# Altium PCB Waistband.PcbDoc (part 1 of 2)
Units mil, origin at the board's own origin, x right, y up, seen from the top; angles counter-clockwise.
Board outline 3000 x 2000 mil, 2 copper layers (Top Layer, Bottom Layer); 52 components, 62 nets, 323 pads, 99 vias.
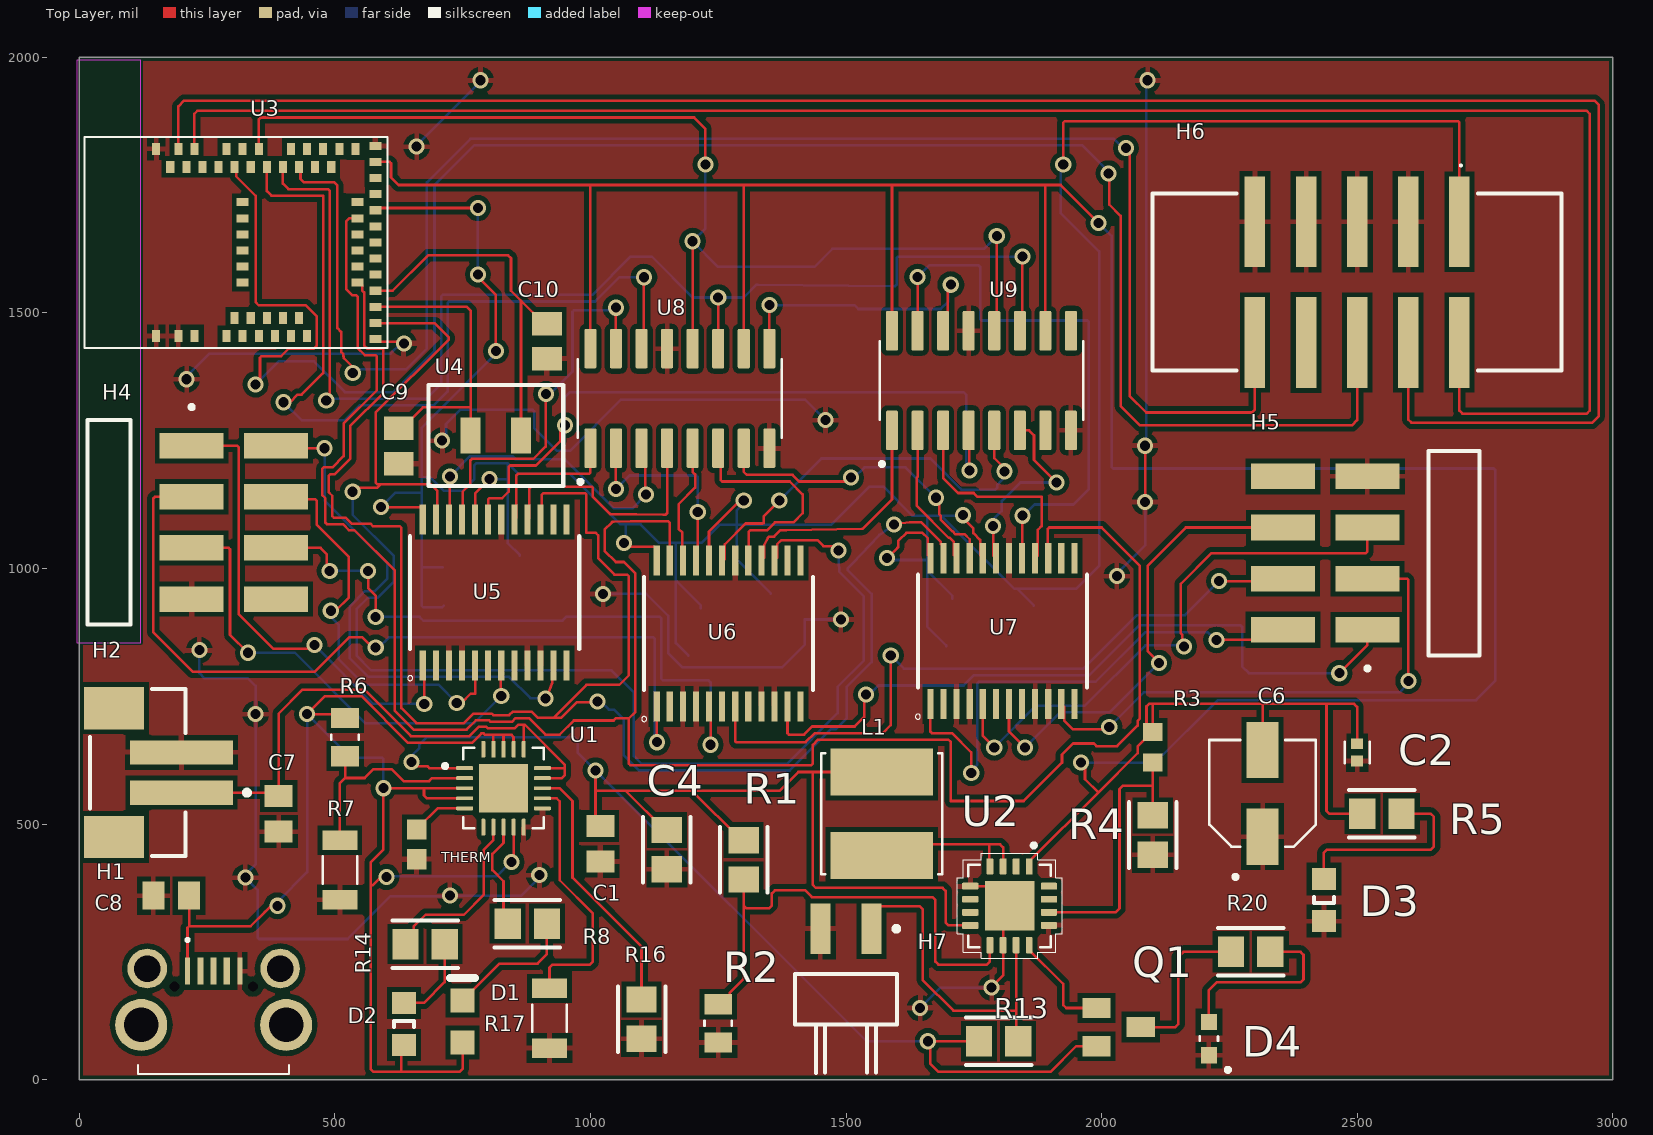
[diagram p0: Top Layer view]
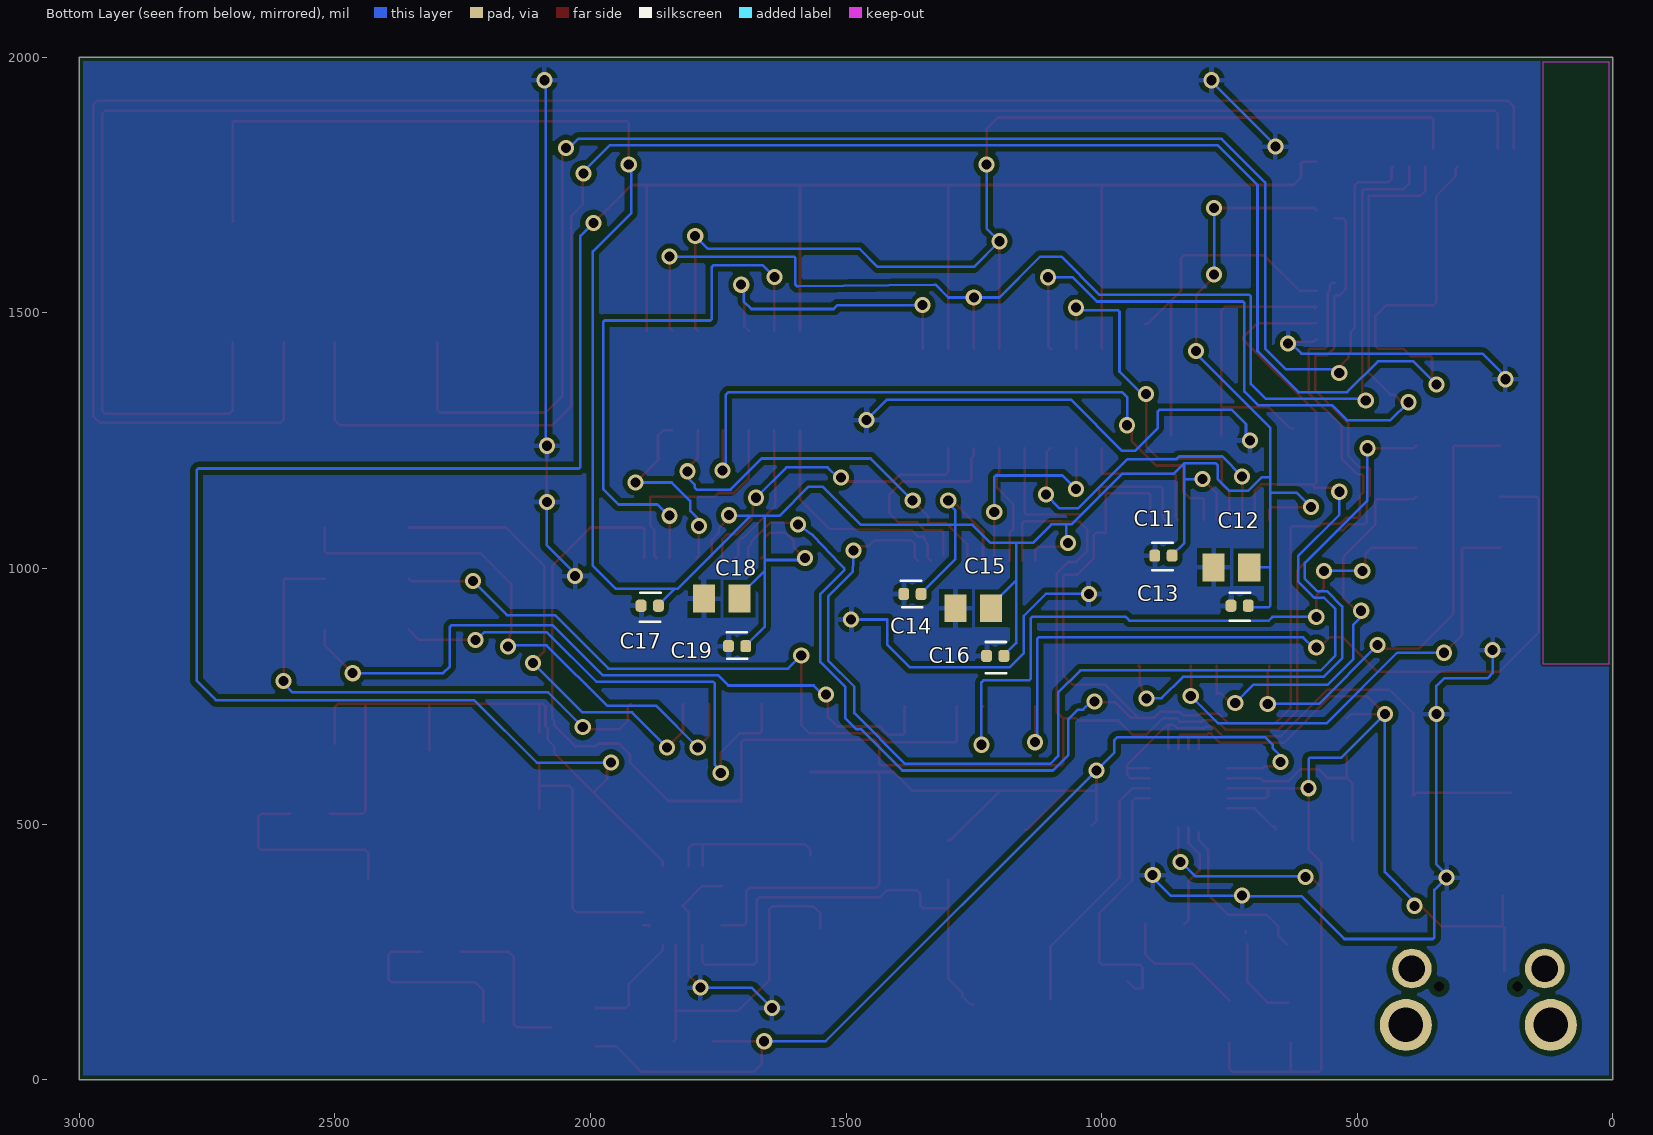
[diagram p1: Bottom Layer view, seen from below]

## Layer stack, top to bottom
Top Solder: solder mask 0.4, Solder Resist, Dk 3.5
Top Layer: signal copper 1.4
Dielectric 1: dielectric 12.6, FR-4, Dk 4.8
Bottom Layer: signal copper 1.4
Bottom Solder: solder mask 0.4, Solder Resist, Dk 3.5

## Board outline
0,0 0,2000 3000,2000 3000,0

## Design rules (kind name [scope] priority, off if disabled: settings)
AssemblyTestpoint [(IsPad And (OnTopLayer Or OnBottomLayer)) Or (IsVia)] p1: testpointundercomponent=TRUE minsize=10 maxsize=100 preferedsize=60 minholesize=0 maxholesize=100 preferedholesize=32 testpointgrid=1 usegrid=FALSE gridtolerance=0.01 allowsidetop=TRUE
BoardOutlineClearance [All] p1: gap=7.87 ignorepadtopadclearanceinfootprint=FALSE
Clearance [All] p1: gap=10 ignorepadtopadclearanceinfootprint=FALSE except(0: Arc-Hole Track-Hole SMDPad-Hole THPad-Hole Via-Hole Fill-Hole Poly-Hole Region-Hole Text-Hole; 5: SMDPad-SMDPad Fill-Fill Fill-Poly Fill-Region Poly-Poly Poly-Region Region-Region; 7.87: Arc-Arc Arc-Track Arc-SMDPad Track-Track Track-SMDPad; 12.99: Arc-THPad Track-THPad)
FabricationTestpoint [(IsPad And (OnTopLayer Or OnBottomLayer)) Or (IsVia)] p1: side=1 testpointundercomponent=TRUE minsize=10 maxsize=100 preferedsize=60 minholesize=0 maxholesize=40 preferedholesize=32 testpointgrid=1 allowsidetop=TRUE usegrid=FALSE gridtolerance=0.01
HoleSize [All] p1: absolutevalues=TRUE maxlimit=39.37 minlimit=7.87 maxpercent=80.000 minpercent=20.000
MinimumAnnularRing [All] p1: minimumring=5.12
MinimumSolderMaskSliver [All] p1: minsoldermaskwidth=8
PolygonConnect [All] p1: connectstyle=Relief reliefconductorwidth=10 reliefentries=4 polygonreliefangle="90 Angle" airgapwidth=10
RoutingVias [All] p1: holewidth=28 width=50 viastyle="Through Hole" minholewidth=7.87 minwidth=15.75 maxholewidth=28 maxwidth=50
SilkToSilkClearance [All] p1: silktosilkclearance=5.91
SilkToSolderMaskClearance [IsPad] p1: minsilkscreentomaskgap=5.91 clearancetoexposedcopper=TRUE
SolderMaskExpansion [All] p1: expansion=1.97 istentingtop=FALSE
Width [All] p1: maxlimit=10 minlimit=5 preferedwidth=5 minimp=50.000000 maximp=50.000000 favimp=50.000000
24 further rules are at their usual default settings.

## Classes and differential pairs
component class Waistband_shiftRegisters: U8 U9
component class Waistband_motorDrivers: C11 C12 C13 C14 C15 C16 C17 C18 C19 H4 H5 U5 U6 U7
component class Waistband_mcu: C9 C10 H6 U3 U4
component class PowerBooster: C1 C2 C4 C6 D3 D4 H7 L1 Q1 R1 R2 R3 R4 R5 R13 R20 U2
component class MCP: C7 C8 D1 D2 H1 H2 R6 R7 R8 R14 R16 R17 THERM U1

## Components (designator, comment, footprint, x,y, rotation, side; value= is the part's Value field where it differs from the comment)
C1 "10uF" C10uF 1019.68,461.57 r90 top
C2 "2.2uF" C2.2UF 2500,640 r90 top
C4 "C0805C104M5UACTU" "Res 0805 1k" 1159.68,270 r90 top
C6 "100uF" C100uF 2310,560 r90 top
C7 "10uF" C10uF 390,520 r90 top locked
C8 "10uF" C10uF 180,360 r0 top
C9 "22pF" 399-17627-1-ND 695,1199.45 r90 top
C10 "22pF" 399-17627-1-ND 985,1404.45 r90 top
C11 "0.1uf" C0.1uF 879,1025 r180 bottom
C12 "10uF" C10uF 746,1002 r180 bottom
C13 "0.1uF" C0.1uF 730,927 r180 bottom
C14 "0.1uF" C0.1uF 1370,950 r180 bottom
C15 "10uF" C10uF 1251,922 r180 bottom
C16 "0.1uF" C0.1uF 1208,829 r180 bottom
C17 "0.1uF" C0.1uF 1883.93,927 r180 bottom
C18 "10uF" C10uF 1743,941 r180 bottom
C19 "0.1uF" C0.1uF 1713,848 r180 bottom
D1 "Orange" LED_orange_0805 780,53.66 r90 top
D2 "Green" LED_green_0805 685,223.66 r270 top
D3 "Blue,Power" LED_blue_0805 2450,271.34 r90 top
D4 "RED" "LED RED" 2210,80 r90 top
H1 "KMMX-BSMT35S-B30TR" "MICROUSB Connector" 258,122 r0 top
H2 "0554600272" JST_Header 114.37,2575.63 r270 top locked
H4 "TSM-104-01-L-DH" SAM10277-ND 100.51,-3760 r90 top
H5 "TSM-104-01-L-DH" SAM10277-ND 2639.49,5880 r270 top
H6 "AWHW_10G-SMD" AWHW10GSMD 2500,1560 r180 top
H7 "BG301-02-A-0540-L-B" BG301-02-A-0540-L-B 2545,60 r180 top locked
L1 "6.8 uH" L6.8uH 1575,520 r90 top
Q1 "MMUN2133LT1G" "PNP BJT" 2033.31,102.6 r270 top locked
R1 "1.87M" "Res 0805 1k" 1309.68,250 r90 top
R2 "340k" R340K 1250,110 r90 top
R3 "1.07M" R1.07M 2100,650 r90 top
R4 "200k" "Res 0805 1k" 2110,298.43 r90 top
R5 "1k" "Res 0805 1k" 2368.43,510 r0 top locked
R6 "270k" R270k 520,670 r90 top locked
R7 "100k" R100K 510,410 r90 top
R8 "1k" "Res 0805 1k" 696.57,295 r0 top locked
R13 "200k" "Res 0805 1k" 1978.43,85 r180 top locked
R14 "1k" "Res 0805 1k" 496.57,255 r0 top locked
R16 "1k" "Res 0805 1k" 1110,-61.57 r90 top locked
R17 "100k" R100K 920,120 r90 top locked
R20 "1k" "Res 0805 1k" 2471.57,260 r180 top locked
THERM "15k" "NTC THERM 15K" 660,460 r90 top locked
U1 "MCP73871-2CCI/ML" MCP 830,570 r0 top
U2 "TPS61090RSAR" "Boost Converter" 1820,340 r270 top locked
U3 "MDBT50Q_52840" MDBT50Q_52840 782.99,-902.36 r90 top locked
U4 "FC13532.7680KAAC0" "FC-135 32.7680KA-AC0" 815,1260 r0 top
U5 "TB6612FNG,C,8,EL" motorDriver_pcb 1307.8,-342.28 r90 top locked
U6 "TB6612FNG,C,8,EL" motorDriver_pcb 1765.43,-422.28 r90 top locked
U7 "TB6612FNG,C,8,EL" motorDriver_pcb 2301.02,-417.72 r90 top locked
U8 "SN74HC595D" SN74HC595D 1230,107.56 r90 top locked
U9 "SN74HC595D" SN74HC595D 1820,142.44 r90 top locked

## Footprints (in the part's own frame and the unit in brackets; to place one, negate y for a bottom-side part, rotate by r counter-clockwise, add the part's x,y. Pads: shape width x height; smd on the part's side, far side on the other; paste and mask are expansions set on the pad)
399-17627-1-ND [mm]
  rect 1.16x1.47 smd: 1(0.141,1.778) 2(1.891,1.778)
AWHW10GSMD [mm]
  rect 1.02x4.5 smd: 1(-5.08,-3) 2(-5.08,3) 3(-2.54,-3) 4(-2.54,3) 5(0,-3) 6(0,3) 7(2.54,-3) 8(2.54,3) 9(5.08,-3) 10(5.08,3)
  silkscreen extent -10.16,-5.85 10.16,4.4, body extent -10.16,-5.15 10.16,5.15, height 10.85
BG301-02-A-0540-L-B [mil] "2_port_male_header"
  rect 39.37x98.43 smd: 1(995,-235) 2(1095,-235)
  silkscreen extent 942,-240 1145,47
"Boost Converter" [mm] "TPS61090RSAR"
  rrect30% 0.81x0.34 smd: 1(-1.955,0.975) 2(-1.955,0.325) 3(-1.955,-0.325) 4(-1.955,-0.975) 9(1.955,-0.975) 10(1.955,-0.325) 11(1.955,0.325) 12(1.955,0.975)
  rrect30% 0.34x0.81 smd: 5(-0.975,-1.955) 6(-0.325,-1.955) 7(0.325,-1.955) 8(0.975,-1.955) 13(0.975,1.955) 14(0.325,1.955) 15(-0.325,1.955) 16(-0.975,1.955)
  rect 2.464x2.464 smd paste-0.497: 17(0,0)
  silkscreen extent -3.1,-2.61 2.61,2.61, body extent -2,-2 2,2, height 1
C0.1uF [mm] "CL05A104KA5NNNC"
  rrect53% 0.54x0.6 smd: 1(-0.43,0) 2(0.43,0)
  silkscreen extent -0.54,-0.74 0.46,0.64, body extent -0.5,-0.25 0.5,0.25, height 0.55
C2.2UF [mm] "JMK105BJ225KV"
  rect 0.54x0.6 smd: 1(-0.43,0) 2(0.43,0)
  silkscreen extent -0.53,-0.62 0.53,0.62
C10uF [mm] "CL21A106KOQNNNE"
  rect 1.1x1.38 smd: 1(-0.885,0) 2(0.885,0)
  body extent -1,-0.63 1,0.63, height 1.35
C100uF [mm] "EEE-HA0J101WR"
  rect 2.8x1.6 smd: 1(-2.15,-0.127) 2(2.15,-0.127)
  silkscreen extent -4.25,-2.78 2.65,2.52, body extent -3,-2.78 3,2.52, height 5.8
"FC-135 32.7680KA-AC0" [mm]
  rect 1x1.8 smd: 1(-1.25,0) 2(1.25,0)
  silkscreen extent -3.35,-2.5 3.35,2.5
JST_Header [mm]
  rect 1.2x5.1 smd paste+0 mask+0: 1(51.165,2.175) 2(49.165,2.175)
  rect 2.1x3 smd paste+0 mask+0: 3(46.965,-1.175) 4(53.365,-1.175)
  silkscreen extent 46.02,-2.37 54.31,5.55, body extent 45.82,-2.78 54.51,4.82, height 0.25
L6.8uH [mm] "SRN6045TA-6R8M"
  rect 2.35x5.1 smd: 1(-2.075,0.127) 2(2.075,0.127)
  silkscreen extent -3,-2.87 3,3.13
"LED RED" [mm] "SML-D12U1WT86"
  rect 0.8x0.8 smd: A(0.825,0) C(-0.825,0)
  silkscreen extent -1.65,-1.04 0.11,0.45
LED_blue_0805 [mm]
  rect 1.1x1.2 smd: 1(0.982,0.381) 2(3.082,0.381)
  silkscreen extent 1.88,-0.12 2.18,0.88, body extent 1.03,-0.24 3.03,1.01, height 0.68
LED_green_0805 [mm]
  rect 1.1x1.2 smd: 1(1.871,-1.27) 2(3.971,-1.27)
  silkscreen extent 2.77,-1.77 3.07,-0.77, body extent 1.92,-1.89 3.92,-0.64, height 0.68
LED_orange_0805 [mm]
  rect 1.2x1.2 smd: 1(0.474,0.762) 2(2.574,0.762)
  silkscreen extent 3.67,0.14 3.67,1.39, body extent 0.52,0.14 2.52,1.39, height 0.8
MCP [mm] "MCP73871-2CC1/ML"
  rrect50% 0.84x0.191 smd: 1(-1.935,1) 2(-1.935,0.5) 3(-1.935,0) 4(-1.935,-0.5) 5(-1.935,-1) 11(1.935,-1) 12(1.935,-0.5) 13(1.935,0) 14(1.935,0.5) 15(1.935,1)
  rrect50% 0.191x0.84 smd: 6(-1,-1.935) 7(-0.5,-1.935) 8(0,-1.935) 9(0.5,-1.935) 10(1,-1.935) 16(1,1.935) 17(0.5,1.935) 18(0,1.935) 19(-0.5,1.935) 20(-1,1.935)
  rect 2.413x2.413 smd paste-2: 21(0,0)
  silkscreen extent -3,-2 2,2
MDBT50Q_52840 [mm]
  rect 0.6x0.4 smd mask+0.05: 1(59.866,16.066) 2(59.866,14.966) 3(59.866,14.166) 34(69.166,6.166) 55(69.166,16.066)
  rect 0.584x0.4 smd mask+0.05: 4(59.866,12.566) 5(60.766,12.166) 6(59.866,11.766) 7(60.766,11.366) 8(59.866,10.966) 9(60.766,10.566) 10(59.866,10.166) 11(60.766,9.766) 12(59.866,9.366) 13(60.766,8.966) 14(59.866,8.566) 35(69.166,6.966) 36(68.266,7.366) 37(69.166,7.766) 38(68.266,8.166) 39(69.166,8.566) 40(68.266,8.966) 41(69.166,9.366) 42(68.266,9.766) 43(68.266,10.566) 44(69.166,10.966) 45(68.266,11.366) 46(69.166,11.766) 47(68.266,12.166) 48(69.166,12.566) 49(68.266,12.966) 50(68.266,13.766) 51(69.166,14.166) 52(68.266,14.566) 53(69.166,14.966) 54(68.266,15.366)
  rect 0.4x0.6 smd mask+0.05: 15(59.716,5.166) 16(60.516,5.166) 17(61.316,5.166) 31(67.716,5.166) 32(68.516,5.166) 33(69.316,5.166) 56(62.516,11.766) 57(63.316,11.766) 58(64.116,11.766) 59(64.916,11.766) 60(65.716,11.766) 61(66.516,11.766)
  rect 0.4x0.584 smd mask+0.05: 18(62.116,5.166) 19(62.516,6.066) 20(62.916,5.166) 21(63.316,6.066) 22(63.716,5.166) 23(64.116,6.066) 24(64.516,5.166) 25(64.916,6.066) 26(65.316,5.166) 27(65.716,6.066) 28(66.116,5.166) 29(66.516,6.066) 30(66.916,5.166)
  silkscreen extent 59.27,4.57 69.77,19.63
"MICROUSB Connector" [mm]
  rect 0.25x1.35 smd: 1(-1.173,2.294) 5(1.427,2.294)
  rect 0.305x1.35 smd: 2(-0.523,2.294) 3(0.127,2.294) 4(0.777,2.294)
  round 2.586 hole 1.724: MH1(-3.473,-0.381) MH2(3.727,-0.381)
  round 1.969 hole 1.312: MH3(-3.173,2.419) MH4(3.427,2.419)
  round 0.4 hole 0.5 unplated: MH5(-1.823,1.519) MH6(2.077,1.519)
  silkscreen extent -3.62,-2.83 3.88,3.89, body extent -4.23,-2.83 4.49,2.97, height 2.28
motorDriver_pcb [mil]
  rect 59.06x12 smd: 1(1152.28,635.75) 2(1152.28,610.16) 3(1152.28,584.57) 4(1152.28,558.98) 5(1152.28,533.39) 6(1152.28,507.8) 7(1152.28,482.2) 8(1152.28,456.61) 9(1152.28,431.02) 10(1152.28,405.43) 11(1152.28,379.84) 12(1152.28,354.25) 13(1437.72,354.25) 14(1437.72,379.84) 15(1437.72,405.43) 16(1437.72,431.02) 17(1437.72,456.61) 18(1437.72,482.2) 19(1437.72,507.8) 20(1437.72,533.39) 21(1437.72,558.98) 22(1437.72,584.57) 23(1437.72,610.16) 24(1437.72,635.75)
  silkscreen extent 1123,330 1405,665
"NTC THERM 15K" [mm] "NCP18XW153J03RB"
  rect 1x0.97 smd: 1(-0.735,0) 2(0.735,0)
"PNP BJT" [mm] "MMUN2133LT1G"
  rect 1x1.4 smd: 1(-0.95,-1.1) 2(0.95,-1.1) 3(0,1.1)
R1.07M [mm]
  rect 0.9x0.97 smd: 1(-0.76,0) 2(0.76,0)
R100K [mm] "RE1206FRE07100KL"
  rect 0.97x1.73 smd: 1(-1.48,0) 2(1.48,0)
  silkscreen extent -0.67,-0.85 0.67,0.85, body extent -1.55,-0.8 1.55,0.8, height 0.65
R270k [mm] "RESC2012X65N"
  rect 1.01x1.38 smd: 1(-0.95,0) 2(0.95,0)
  silkscreen extent -0.12,-0.68 0.12,0.68
R340K [mm] "RMCF0805FT340K"
  rect 1.01x1.38 smd: 1(-0.95,0) 2(0.95,0)
  silkscreen extent -0.12,-0.68 0.12,0.68
"Res 0805 1k" [mil]
  rect 51.42x59.44 smd paste+0 mask+0: 1(141.57,10) 2(218.43,10)
  silkscreen extent 116,-36 244,56, body extent 96,-39 264,59, height 10
SAM10277-ND [mm]
  rect 1.27x3.18 smd: 01(127,-3.035) 02(127,-7.225) 03(124.46,-3.035) 04(124.46,-7.225) 05(121.92,-3.035) 06(121.92,-7.225) 07(119.38,-3.035) 08(119.38,-7.225)
  silkscreen extent 118.11,-3.14 129.02,2.15
SN74HC595D [mm]
  rrect25% 1.97x0.6 smd: 1(28.64,5.842) 2(28.64,4.572) 3(28.64,3.302) 4(28.64,2.032) 5(28.64,0.762) 6(28.64,-0.508) 7(28.64,-1.778) 8(28.64,-3.048) 9(33.59,-3.048) 10(33.59,-1.778) 11(33.59,-0.508) 12(33.59,0.762) 13(33.59,2.032) 14(33.59,3.302) 15(33.59,4.572) 16(33.59,5.842)
  silkscreen extent 26.87,-3.67 33.07,6.46, body extent 28.05,-3.43 34.05,6.47, height 1.75

## Part data
C1 C7 C8 C12 C15 C18: library part CL21A106KOQNNNE, "Ceramic capacitor SMD-0805 10000nF (10uF) /16V X5R# K +-10% Samsung , RoHS/4000pcs/", Case Code (Imperial)=0805, Case Code (Metric)=2012, Dielectric=X7R, Manufacturer=Samsung, Max Operating Temperature=85°C, Min Operating Temperature=-55°C, Package Quantity=1, Supplier Part Number 1=1276-1096-1-ND, Tolerance=10%, Voltage=16V, Capacitance=10uF, Case/Package=0805, Category="Ceramic Capacitors", ComponentLink1Description=https://datasheet.ciiva.com/25798/cl21a106koqnnne-25798133.pdf?src-supplier=Digi-Key, ComponentLink1URL=https://datasheet.ciiva.com/25798/cl21a106koqnnne-25798133.pdf?src-supplier=Digi-Key, ComponentLink2Description=https://datasheet.ciiva.com/15216/getdatasheetpartid-358435-15216234.pdf?src-supplier=Verical, ComponentLink2URL=https://datasheet.ciiva.com/15216/getdatasheetpartid-358435-15216234.pdf?src-supplier=Verical, ComponentLink3Description=https://datasheet.ciiva.com/16740/cl05b104kq5nnnc-16740697.pdf?src-supplier=Future+Electronics, ComponentLink3URL=https://datasheet.ciiva.com/16740/cl05b104kq5nnnc-16740697.pdf?src-supplier=Future+Electronics, Construction=Flat, Depth=1.25mm, Height=1.25mm, Lead Free="Lead Free", Length=2mm, Manufacturer Part Number=CL21A106KOQNNNE, Mount="Surface Mount", Packaging="Tape and Reel", Pricing 1="1=0.11000, 10=0.08100, 50=0.04400, 100=0.03600, 500=0.02568, 1000=0.02018 (USD)", Radiation Hardening=No, RoHS=Yes, RoHS Compliant=Yes, Series=CL, Stock 1=250843, Supplier 1=Digi-Key, Thickness=0.055inch, Voltage Rating=16V, Voltage Rating (DC)=16V, Width=0.049inch
C2: library part JMK105BJ225KV-F, "CAP CER 2.2UF 6.3V X5R 0402", Case Code (Imperial)=0402, Case Code (Metric)=1005, Dielectric=X5R, Manufacturer="Taiyo Yuden", Max Operating Temperature=85°C, Min Operating Temperature=-55°C, Package Quantity=10000, Resistor Type=Ceramic, Supplier Part Number 1=587-5867-1-ND, Tolerance=10%, Voltage Rating=6.3V, Capacitance=2.2uF, Case/Package=0402, Category="Ceramic Capacitors", ComponentLink1Description=https://datasheet.ciiva.com/15921/tmk105b7103kv-15921011.pdf?src-supplier=Onlinecomponents.com, ComponentLink1URL=https://datasheet.ciiva.com/15921/tmk105b7103kv-15921011.pdf?src-supplier=Onlinecomponents.com, ComponentLink2Description=https://datasheet.ciiva.com/30178/cmultilayerceramiccapacitor-30178599.pdf?src-supplier=Onlinecomponents.com, ComponentLink2URL=https://datasheet.ciiva.com/30178/cmultilayerceramiccapacitor-30178599.pdf?src-supplier=Onlinecomponents.com, Construction=Flat, Depth=0.5mm, Height=0.5mm, Length=1mm, Manufacturer Part Number=JMK105BJ225KV-F, Mount="Surface Mount", Packaging="Tape and Reel", Pricing 1="1=0.10000, 10=0.05900, 50=0.03240, 100=0.02650, 500=0.01892, 1000=0.01486, 2500=0.01351, 5000=0.01243 (USD)", Radiation Hardening=No, RoHS=Yes, RoHS Compliant=Yes, Series=M, Stock 1=1524772, Supplier 1=Digi-Key, Termination=SMD/SMT, Thickness=0.022inch, Voltage Rating (DC)=6.3V, Width=0.5mm
C4: "Cap Ceramic 0.1uF 50V Z5U 20% SMD 0805 85C Paper T/R", Capacitance=100nF, Case Code (Imperial)=0805, Case Code (Metric)=2012, Dielectric=Z5U, Dielectric Material=Ceramic, Manufacturer=KEMET, Max Operating Temperature=85°C, Min Operating Temperature=10°C, Package Quantity=1, Supplier Part Number 1=399-C0805C104M5UAC7800CT-ND, Tolerance=20%, Voltage=50V, Case/Package=0805, Category="Ceramic Capacitors", ComponentLink1Description=https://datasheet.ciiva.com/18193/getdatasheetpartid-89715-18193450.pdf?src-supplier=Verical, ComponentLink1URL=https://datasheet.ciiva.com/18193/getdatasheetpartid-89715-18193450.pdf?src-supplier=Verical, ComponentLink2Description=https://datasheet.ciiva.com/26847/getdatasheetpartid-314452-26847798.pdf?src-supplier=Verical, ComponentLink2URL=https://datasheet.ciiva.com/26847/getdatasheetpartid-314452-26847798.pdf?src-supplier=Verical, ComponentLink3Description=https://datasheet.ciiva.com/7842/kem-c1004-z5u-smd-7842541.pdf?src-supplier=Element14, ComponentLink3URL=https://datasheet.ciiva.com/7842/kem-c1004-z5u-smd-7842541.pdf?src-supplier=Element14, Construction=Flat, Contact Plating=Tin,Matte, Depth=1.25mm, Dissipation Factor=4%, Height=0.78mm, Lead Free="Lead Free", Lead Pitch=0.75mm, Length=2mm, Manufacturer Part Number=C0805C104M5UACTU, Mount="Surface Mount,PCB", Number of Pins=2, Packaging="Tape and Reel", Pricing 1="1=0.18000, 10=0.12700, 50=0.07220, 100=0.05980, 500=0.04194, 1000=0.03472 (USD)", Radiation Hardening=No, REACH SVHC="No SVHC", RoHS=Yes, RoHS Compliant=Yes, Series=C, Stock 1=106, Supplier 1=Digi-Key, Termination=SMD/SMT, Thickness=0.035inch, Voltage Rating=50V, Voltage Rating (DC)=50V, Width=1.2mm
C6: library part EEE-HA0J101WR, "Cap Aluminum 100uF 6.3V 20% (5 X 5.4mm) SMD 47mA 1000 hr 105°C T/R", Case/Package=Radial, Leakage Current=6.3uA, Manufacturer=Panasonic, Max Operating Temperature=105°C, Min Operating Temperature=-40°C, Package Quantity=1000, Ripple Current=47mA, Supplier Part Number 1=PCE4156CT-ND, Tolerance=20%, Voltage=6.3V, Capacitance=100uF, Category="Aluminum Electrolytic Capacitors", ComponentLink1Description=https://datasheet.ciiva.com/2985/aba0000ce3-2985609.pdf?src-supplier=Avnet, ComponentLink1URL=https://datasheet.ciiva.com/2985/aba0000ce3-2985609.pdf?src-supplier=Avnet, ComponentLink2Description=https://datasheet.ciiva.com/24068/aba0000ce3-259063-24068875.pdf?src-supplier=Mouser, ComponentLink2URL=https://datasheet.ciiva.com/24068/aba0000ce3-259063-24068875.pdf?src-supplier=Mouser, ComponentLink3Description=https://datasheet.ciiva.com/11675/aba0000ce3-11675884.pdf?src-supplier=Avnet, ComponentLink3URL=https://datasheet.ciiva.com/11675/aba0000ce3-11675884.pdf?src-supplier=Avnet, ComponentLink4Description=https://datasheet.ciiva.com/28694/1446029-28694662.pdf?src-supplier=Element14, ComponentLink4URL=https://datasheet.ciiva.com/28694/1446029-28694662.pdf?src-supplier=Element14, ComponentLink5Description=https://datasheet.ciiva.com/43459/1446029-43459799.pdf?src-supplier=Farnell, ComponentLink5URL=https://datasheet.ciiva.com/43459/1446029-43459799.pdf?src-supplier=Farnell, ComponentLink6Description=https://datasheet.ciiva.com/6134/1446029-6134153.pdf?src-supplier=Farnell, ComponentLink6URL=https://datasheet.ciiva.com/6134/1446029-6134153.pdf?src-supplier=Farnell, ComponentLink7Description=https://datasheet.ciiva.com/16433/aba0000ce3-16433449.pdf?src-supplier=Future+Electronics, ComponentLink7URL=https://datasheet.ciiva.com/16433/aba0000ce3-16433449.pdf?src-supplier=Future+Electronics, ComponentLink8Description=https://datasheet.ciiva.com/30215/33aba0000ce3-30215722.pdf?src-supplier=Onlinecomponents.com, ComponentLink8URL=https://datasheet.ciiva.com/30215/33aba0000ce3-30215722.pdf?src-supplier=Onlinecomponents.com, ComponentLink9Description=https://datasheet.ciiva.com/17536/aba0000ce3-17536407.pdf?src-supplier=Avnet+Europe, ComponentLink9URL=https://datasheet.ciiva.com/17536/aba0000ce3-17536407.pdf?src-supplier=Avnet+Europe, ComponentLink10Description=https://datasheet.ciiva.com/46390/1446029-46390441.pdf?src-supplier=Element14, ComponentLink10URL=https://datasheet.ciiva.com/46390/1446029-46390441.pdf?src-supplier=Element14, Construction=Cylindrical, Contact Plating=Tin, Diameter=5mm, Height=5.4mm, Height - Seated (Max)=0.213inch, Lead Diameter=0.65mm, Lead Free="Lead Free", Lead Pitch=1.5mm, Length=5.5mm, Life (Hours)=1000Hour, Manufacturer Part Number=EEE-HA0J101WR, Mount="Surface Mount,PCB", Packaging="Tape and Reel", Polarity=Polar, Pricing 1="1=0.44000, 10=0.30400, 50=0.21260, 100=0.18220, 500=0.13668 (USD)", Radiation Hardening=No, REACH SVHC=Unknown, Ripple Current (AC)=47mA, RoHS=Yes, RoHS Compliant=Yes, Series=HA, Stock 1=728, Supplier 1=Digi-Key, Termination=SMD/SMT, Voltage Rating=6.3V, Voltage Rating (DC)=6.3V, Width=650um
C9 C10: library part C0805C220K5RACAUTO, "Cap Ceramic 22pF 50V X7R 10% SMD 0805 125°C Paper T/R", Case Code (Imperial)=0805, Case Code (Metric)=2012, Manufacturer=KEMET, Max Operating Temperature=125°C, Min Operating Temperature=-55°C, Ratings=AEC-Q200, Supplier Part Number 1=399-17627-1-ND, Tolerance=10%, Voltage Rating=50V, Capacitance=22pF, Case/Package=0805, Category="Ceramic Capacitors", ComponentLink1Description=http://www.farnell.com/datasheets/2750125.pdf?src-supplier=Farnell, ComponentLink1URL=http://www.farnell.com/datasheets/2750125.pdf?src-supplier=Farnell, ComponentLink2Description=https://api.kemet.com/component-edge/download/datasheet/C0805C220K5RACAUTO.pdf?src-supplier=Digi-Key, ComponentLink2URL=https://api.kemet.com/component-edge/download/datasheet/C0805C220K5RACAUTO.pdf?src-supplier=Digi-Key, ComponentLink3Description=https://search.kemet.com/component-edge/download/datasheet/C0805C220K5RACAUTO.pdf?src-supplier=Digi-Key, ComponentLink3URL=https://search.kemet.com/component-edge/download/datasheet/C0805C220K5RACAUTO.pdf?src-supplier=Digi-Key, ComponentLink4Description=http://www.farnell.com/datasheets/2750125.pdf?src-supplier=Newark, ComponentLink4URL=http://www.farnell.com/datasheets/2750125.pdf?src-supplier=Newark, Manufacturer Part Number=C0805C220K5RACAUTO, Mount="Surface Mount", Packaging="Tape and Reel", Pricing 1="1=0.28000, 10=0.19000, 50=0.12680, 100=0.10770, 500=0.07604, 1000=0.06653 (USD)", RoHS=Yes, RoHS Compliant=Yes, Stock 1=12821, Supplier 1=Digi-Key
C11 C13 C14 C16 C17 C19: library part C0805C104M5UACTU, "Cap Ceramic 0.1uF 50V Z5U 20% SMD 0805 85C Paper T/R", Capacitance=100nF, Case Code (Imperial)=0805, Case Code (Metric)=2012, Dielectric=Z5U, Dielectric Material=Ceramic, Manufacturer=KEMET, Max Operating Temperature=85°C, Min Operating Temperature=10°C, Package Quantity=1, Supplier Part Number 1=399-C0805C104M5UAC7800CT-ND, Tolerance=20%, Voltage=50V, Case/Package=0805, Category="Ceramic Capacitors", ComponentLink1Description=https://datasheet.ciiva.com/18193/getdatasheetpartid-89715-18193450.pdf?src-supplier=Verical, ComponentLink1URL=https://datasheet.ciiva.com/18193/getdatasheetpartid-89715-18193450.pdf?src-supplier=Verical, ComponentLink2Description=https://datasheet.ciiva.com/26847/getdatasheetpartid-314452-26847798.pdf?src-supplier=Verical, ComponentLink2URL=https://datasheet.ciiva.com/26847/getdatasheetpartid-314452-26847798.pdf?src-supplier=Verical, ComponentLink3Description=https://datasheet.ciiva.com/7842/kem-c1004-z5u-smd-7842541.pdf?src-supplier=Element14, ComponentLink3URL=https://datasheet.ciiva.com/7842/kem-c1004-z5u-smd-7842541.pdf?src-supplier=Element14, Construction=Flat, Contact Plating=Tin,Matte, Depth=1.25mm, Dissipation Factor=4%, Height=0.78mm, Lead Free="Lead Free", Lead Pitch=0.75mm, Length=2mm, Manufacturer Part Number=C0805C104M5UACTU, Mount="Surface Mount,PCB", Number of Pins=2, Packaging="Tape and Reel", Pricing 1="1=0.18000, 10=0.12700, 50=0.07220, 100=0.05980, 500=0.04194, 1000=0.03472 (USD)", Radiation Hardening=No, REACH SVHC="No SVHC", RoHS=Yes, RoHS Compliant=Yes, Series=C, Stock 1=106, Supplier 1=Digi-Key, Termination=SMD/SMT, Thickness=0.035inch, Voltage Rating=50V, Voltage Rating (DC)=50V, Width=1.2mm
D1: library part HSMD-C170, "Diode Led HSMD/C170 AGILENT RoHS Orange SO0805", Case Code (Imperial)=0805, Case Code (Metric)=2012, Forward Current=20mA, Forward Voltage=2.2V, Lens Color=White, Manufacturer="Broadcom Avago", Max Operating Temperature=85°C, Max Power Dissipation=52mW, Min Operating Temperature=-40°C, Package Quantity=4000, Reverse Voltage=5V, Supplier Part Number 1=516-1794-1-ND, Case/Package=0805, Category=LEDs, Color=Orange, ComponentLink1Description=https://datasheet.ciiva.com/11774/0900766b804a6539-11774453.pdf?src-supplier=RSComponents, ComponentLink1URL=https://datasheet.ciiva.com/11774/0900766b804a6539-11774453.pdf?src-supplier=RSComponents, ComponentLink2Description=https://datasheet.ciiva.com/22656/1825780-22656576.pdf?src-supplier=Element14, ComponentLink2URL=https://datasheet.ciiva.com/22656/1825780-22656576.pdf?src-supplier=Element14, ComponentLink3Description=https://datasheet.ciiva.com/15117/getdatasheetpartid-148813-15117896.pdf?src-supplier=Verical, ComponentLink3URL=https://datasheet.ciiva.com/15117/getdatasheetpartid-148813-15117896.pdf?src-supplier=Verical, ComponentLink4Description=https://datasheet.ciiva.com/29280/180497-da-01-en-chip-led-hsmd-c170-orange-29280979.pdf?src-supplier=Conrad, ComponentLink4URL=https://datasheet.ciiva.com/29280/180497-da-01-en-chip-led-hsmd-c170-orange-29280979.pdf?src-supplier=Conrad, ComponentLink5Description=https://datasheet.ciiva.com/14172/swseriehsmx-c150toc190-e-14172165.pdf?src-supplier=Distrelec, ComponentLink5URL=https://datasheet.ciiva.com/14172/swseriehsmx-c150toc190-e-14172165.pdf?src-supplier=Distrelec, Contact Plating=Gold, Depth=1.25mm, Dominant Wavelength=604nm, Height=0.8mm, Illumination Color=Orange, Lead Free="Lead Free", Length=2mm, Lens Style=Rectangular,Diffused,Colorless, Lens Transparency=Diffused, Luminous Intensity=8mcd, Manufacturer Part Number=HSMD-C170, Mount="Surface Mount", Number of Elements=1, Number of LEDs=1, Number of Pins=2, Packaging="Tape and Reel", Power Dissipation=52mW, Power Rating=52mW, Pricing 1="1=0.41000, 10=0.27000, 100=0.18020, 500=0.12466, 1000=0.10388, 2000=0.09349 (USD)", Radiation Hardening=No, REACH SVHC="No SVHC", RoHS=Yes, RoHS Compliant=Yes, Series=-, Stock 1=282, Supplier 1=Digi-Key, Test Current=20mA, Viewing Angle=170°, Voltage Rating (DC)=2.2V, Wavelength=604nm, Width=1.25mm
D2: library part 150080VS75000, "Led, Green, 570 Nm, 2 V, 30 Ma, 40 Mcd Rohs Compliant: Yes", Case Code (Imperial)=0805, Case Code (Metric)=2012, Forward Current=30mA, Forward Voltage=2V, Manufacturer="Wurth Electronics", Max Operating Temperature=85°C, Min Operating Temperature=-40°C, Package Quantity=4000, Supplier Part Number 1=732-4986-1-ND, Test Current=20mA, Case/Package=0805, Category=LEDs, Color=Green, ComponentLink1Description=https://datasheet.ciiva.com/22656/150080vs75000-22656966.pdf?src-supplier=Element14, ComponentLink1URL=https://datasheet.ciiva.com/22656/150080vs75000-22656966.pdf?src-supplier=Element14, ComponentLink2Description=https://datasheet.ciiva.com/29279/759437-da-01-en-chipled-0805-w-kl-h-gruen-150080vs7500-29279047.pdf?src-supplier=Conrad, ComponentLink2URL=https://datasheet.ciiva.com/29279/759437-da-01-en-chipled-0805-w-kl-h-gruen-150080vs7500-29279047.pdf?src-supplier=Conrad, ComponentLink3Description=https://datasheet.ciiva.com/29563/150080vs75000-29563018.pdf?src-supplier=Digi-Key, ComponentLink3URL=https://datasheet.ciiva.com/29563/150080vs75000-29563018.pdf?src-supplier=Digi-Key, Dominant Wavelength=570nm, Height=0.7mm, Length=2mm, Lens Style=Clear,Rectangular, Luminous Intensity=40mcd, Manufacturer Part Number=150080VS75000, Mount="Surface Mount", Packaging="Tape and Reel", Pricing 1="1=0.18000, 50=0.17100, 100=0.14700, 500=0.12700 (USD)", REACH SVHC=Unknown, RoHS=Yes, Stock 1=26965, Supplier 1=Digi-Key, Viewing Angle=140°, Wavelength=570nm, Width=1.25mm
D3: library part 150080BS75000, "Led, Blue, 470 Nm, 3.2 V, 30 Ma, 145 Mcd Rohs Compliant: Yes", Case Code (Imperial)=0805, Case Code (Metric)=2012, Color=Blue, Forward Current=30mA, Forward Voltage=3.2V, Manufacturer="Wurth Electronics", Max Operating Temperature=85°C, Min Operating Temperature=-40°C, Package Quantity=4000, Supplier Part Number 1=732-4982-1-ND, Test Current=20mA, Case/Package=0805, Category=LEDs, ComponentLink1Description=https://datasheet.ciiva.com/22656/1740214-22656954.pdf?src-supplier=Element14, ComponentLink1URL=https://datasheet.ciiva.com/22656/1740214-22656954.pdf?src-supplier=Element14, ComponentLink2Description=https://datasheet.ciiva.com/23843/150080bs75000-23843251.pdf?src-supplier=Newark, ComponentLink2URL=https://datasheet.ciiva.com/23843/150080bs75000-23843251.pdf?src-supplier=Newark, ComponentLink3Description=https://datasheet.ciiva.com/29279/759433-da-01-en-chipled-0805-w-kl-blau-150080bs75000-29279203.pdf?src-supplier=Conrad, ComponentLink3URL=https://datasheet.ciiva.com/29279/759433-da-01-en-chipled-0805-w-kl-blau-150080bs75000-29279203.pdf?src-supplier=Conrad, ComponentLink4Description=https://datasheet.ciiva.com/29562/150080bs75000-29562922.pdf?src-supplier=Digi-Key, ComponentLink4URL=https://datasheet.ciiva.com/29562/150080bs75000-29562922.pdf?src-supplier=Digi-Key, ComponentLink5Description=https://datasheet.ciiva.com/29562/150080bs75000-29562923.pdf?src-supplier=Digi-Key, ComponentLink5URL=https://datasheet.ciiva.com/29562/150080bs75000-29562923.pdf?src-supplier=Digi-Key, Dominant Wavelength=470nm, Height=0.7mm, Lead Free="Lead Free", Length=2mm, Lens Style=Clear,Rectangular, Luminous Intensity=145mcd, Manufacturer Part Number=150080BS75000, Mount="Surface Mount", Packaging="Tape and Reel", Pricing 1="1=0.18000, 50=0.17100, 100=0.14700, 500=0.12700 (USD)", REACH SVHC=Unknown, RoHS=Yes, RoHS Compliant=Yes, Stock 1=55201, Supplier 1=Digi-Key, Viewing Angle=140°, Wavelength=470nm, Width=1.25mm
D4: library part SML-D12U1WT86, "Red 620nm LED Indication - Discrete 2.2V 0603 (1608 Metric)", Case Code (Imperial)=0603, Case Code (Metric)=1608, Color=Red, Forward Voltage=2.2V, Lens Color=White, Manufacturer=Rohm, Supplier Part Number 1=SML-D12U1WT86CT-ND, Test Current=20mA, Case/Package=0603, Category=LEDs, ComponentLink1Description=https://www.rohm.com/datasheet/SML-D12U1W?src-supplier=Digi-Key, ComponentLink1URL=https://www.rohm.com/datasheet/SML-D12U1W?src-supplier=Digi-Key, Dominant Wavelength=620nm, Height=0.65mm, Lead Free="Lead Free", Length=1.6mm, Lens Transparency=Diffused, Luminous Intensity=63mcd, Manufacturer Part Number=SML-D12U1WT86, Mount="Surface Mount", Packaging="Tape and Reel", Pricing 1="1=0.21000, 10=0.11500, 100=0.05340, 500=0.04928, 1000=0.03861 (USD)", RoHS=Yes, RoHS Compliant=Yes, Stock 1=1414, Supplier 1=Digi-Key, Width=0.8mm
H1: "Conn Micro USB Type B PL 5 POS 0.65mm Solder RA SMD 5 Terminal 1 Port T/R", Case/Package=SMD/SMT, Color=Black, Current Rating=1A, Manufacturer=Kycon, Max Operating Temperature=85°C, Min Operating Temperature=-30°C, Package Quantity=1500, Supplier Part Number 1=2092-KMMX-BSMT35S-B30CT-ND, Voltage Rating=30V, Category="USB Connectors", ComponentLink1Description=http://www.mouser.com/catalog/specsheets/KMMX-BSMT35S-BTR.pdf?src-supplier=Mouser, ComponentLink1URL=http://www.mouser.com/catalog/specsheets/KMMX-BSMT35S-BTR.pdf?src-supplier=Mouser, Connector Type=USB, Contact Material=Brass, Contact Plating=Gold, Manufacturer Part Number=KMMX-BSMT35S-B30TR, Number of Contacts=5, Number of Ports=1, Number of Positions=5, Packaging="Tape and Reel", Plating=Tin, Pricing 1="1=1.30000, 10=1.09600, 25=1.05120, 50=1.02880, 100=0.98410, 250=0.89460, 500=0.80514, 1000=0.71568 (USD)", RoHS=Yes, RoHS Compliant=Yes, Series=KMMX, Stock 1=3715, Supplier 1=Digi-Key, Termination="Through Hole"
H2: "2.00mm Pitch Mi ll System Wire-to-Board Header, Surface Mount, Single Row, Vertical, 2 Circuits", Color=Natural, Manufacturer=Molex, Max Operating Temperature=105°C, Max Voltage Rating (AC)=125V, Min Operating Temperature=-40°C, Supplier Part Number 1=WM8301CT-ND, Category="Headers and Wire Housings", ComponentLink1Description=https://datasheet.ciiva.com/18487/554600272-sd-18487017.pdf?src-supplier=Digi-Key, ComponentLink1URL=https://datasheet.ciiva.com/18487/554600272-sd-18487017.pdf?src-supplier=Digi-Key, ComponentLink2Description=https://datasheet.ciiva.com/18487/554600272-sd-18487018.pdf?src-supplier=Digi-Key, ComponentLink2URL=https://datasheet.ciiva.com/18487/554600272-sd-18487018.pdf?src-supplier=Digi-Key, ComponentLink3Description=https://datasheet.ciiva.com/18487/554600272-sd-18487019.pdf?src-supplier=Digi-Key, ComponentLink3URL=https://datasheet.ciiva.com/18487/554600272-sd-18487019.pdf?src-supplier=Digi-Key, Connector Type="Male Pin", Contact Material=Bronze, Contact Plating=Tin,Copper, Depth=7mm, Housing Color=Natural, Housing Material=Polyamide, Length=8.1mm, Manufacturer Part Number=0554600272, Mount="Surface Mount", Number of Positions=2, Number of Rows=1, Orientation=Straight, Packaging="Tape and Reel", Pitch=0.079inch, Pricing 1="1=1.33000, 10=1.10500, 100=0.92040 (USD)", RoHS=Yes, RoHS Compliant=Yes, Stock 1=5282, Supplier 1=Digi-Key, Termination=Solder
H4 H5: "Conn Unshrouded Header HDR 8 POS 2.54mm Solder RA Side Entry SMD Bulk", Current Rating=7A, Housing Color=Black, Manufacturer=Samtec, Max Operating Temperature=125°C, Max Voltage Rating (AC)=475V, Min Operating Temperature=-55°C, Supplier Part Number 1=SAM10277-ND, Category="Headers and Wire Housings", ComponentLink1Description=https://datasheet.ciiva.com/25616/0900766b81157e6c-25616892.pdf?src-supplier=RSComponents, ComponentLink1URL=https://datasheet.ciiva.com/25616/0900766b81157e6c-25616892.pdf?src-supplier=RSComponents, Contact Material=Bronze, Contact Plating=Gold, Depth=15.09mm, Gender=Male, Housing Material=Polymer, Lead Free="Lead Free", Length=10.16mm, Manufacturer Part Number=TSM-104-01-L-DH, Max Current Rating=7A, Number of Contacts=8, Number of Rows=2, Orientation=Horizontal, Packaging=Bulk, Pitch=2.54mm, Pricing 1="1=1.76000, 10=1.53000, 100=1.36710, 500=1.13924, 1000=0.97650, 5000=0.86800 (USD)", Radiation Hardening=No, REACH SVHC="No SVHC", RoHS=Yes, RoHS Compliant=Yes, Series=TSM, Stock 1=2054, Supplier 1=Digi-Key, Termination=Solder
H6: "Connector", Arrow Part Number="AWHW 10G-SMD", Manufacturer_Name="ASSMANN WSW components GmbH", Arrow Price/Stock=https://www.arrow.com/en/products/awhw10g-smd/assmann-wsw-components-inc, Datasheet Link=http://www.assmann-wsw.com/uploads/datasheets/ASS_2316_CO.pdf, Height=10.75mm, Manufacturer_Part_Number="AWHW 10G-SMD"
L1: library part B82464G4682M000, "Inductor Power Shielded Wirewound 6.8uH 20% 100KHz Ferrite 4.3A 0.02Ohm DCR Automotive T/R", Case/Package=Nonstandard, Current Rating=2A, DC Current=4.3A, DC Resistance (DCR)=20mR, Inductance=6.8uH, Inductance Tolerance=20%, Manufacturer="TDK EPCOS", Max Operating Temperature=150°C, Min Operating Temperature=-55°C, Package Quantity=750, Ratings=AEC-Q200, Resistor Type=Wirewound, Saturation Current=4.6A, Self Resonant Frequency=28MHz, Supplier Part Number 1=495-1808-1-ND, Test Frequency=100kHz, Category="Fixed Inductors", ComponentLink1Description=https://datasheet.ciiva.com/11803/0900766b804ee4ce-11803039.pdf?src-supplier=RSComponents, ComponentLink1URL=https://datasheet.ciiva.com/11803/0900766b804ee4ce-11803039.pdf?src-supplier=RSComponents, ComponentLink2Description=https://datasheet.ciiva.com/29368/001092599-da-01-en-smt-induktivitaet-b82464g4682m000-750-st-29368829.pdf?src-supplier=Conrad, ComponentLink2URL=https://datasheet.ciiva.com/29368/001092599-da-01-en-smt-induktivitaet-b82464g4682m000-750-st-29368829.pdf?src-supplier=Conrad, ComponentLink3Description=https://datasheet.ciiva.com/22623/1899158-22623110.pdf?src-supplier=Element14, ComponentLink3URL=https://datasheet.ciiva.com/22623/1899158-22623110.pdf?src-supplier=Element14, Core Material=Ferrite, Depth=10.4mm, Height=4.8mm, Height - Seated (Max)=0.189inch, Lead Free="Lead Free", Length=10.4mm, Manufacturer Part Number=B82464G4682M000, Max DC Current=4.3A, Military Standard=Not, Mount="Surface Mount", Packaging="Tape and Reel", Pricing 1="1=2.11000, 10=1.94900, 25=1.78640, 50=1.52640, 100=1.36410, 250=1.16920 (USD)", Radiation Hardening=No, REACH SVHC="No SVHC", RMS Current (Irms)=4.3A, RoHS=Yes, RoHS Compliant=Yes, Shielding=Shielded, Stock 1=47, Supplier 1=Digi-Key, Termination=SMD/SMT, Tolerance=20%, Weight=0.070548oz, Width=10.4mm
Q1: "PNP Ic=-100mA Vceo=-50V hfe=80~140 P=246mW", Case/Package=SOT-23-3, Collector Emitter Breakdown Voltage=50V, Collector Emitter Saturation Voltage=250mV, Continuous Collector Current=100mA, Current Rating=-100mA, Manufacturer="ON Semiconductor", Max Operating Temperature=150°C, Max Power Dissipation=246mW, Min Operating Temperature=-55°C, Package Quantity=1, Supplier Part Number 1=MMUN2133LT1GOSCT-ND, Voltage Rating (DC)=-50V, Category=BJTs, Collector Emitter Voltage (VCEO)=50V, Collector-emitter Voltage-Max=250mV, ComponentLink1Description=https://datasheet.ciiva.com/30480/0900766b8124e2ed-30480364.pdf?src-supplier=RSComponents, ComponentLink1URL=https://datasheet.ciiva.com/30480/0900766b8124e2ed-30480364.pdf?src-supplier=RSComponents, ComponentLink2Description=https://datasheet.ciiva.com/23819/1708306-23819938.pdf?src-supplier=Newark, ComponentLink2URL=https://datasheet.ciiva.com/23819/1708306-23819938.pdf?src-supplier=Newark, ComponentLink3Description=https://datasheet.ciiva.com/15139/getdatasheetpartid-53178-15139583.pdf?src-supplier=Verical, ComponentLink3URL=https://datasheet.ciiva.com/15139/getdatasheetpartid-53178-15139583.pdf?src-supplier=Verical, ComponentLink4Description=https://datasheet.ciiva.com/990/dta143z-d-990631.pdf?src-supplier=Digi-Key, ComponentLink4URL=https://datasheet.ciiva.com/990/dta143z-d-990631.pdf?src-supplier=Digi-Key, ComponentLink5Description=https://datasheet.ciiva.com/990/dta143z-d-990632.pdf?src-supplier=Digi-Key, ComponentLink5URL=https://datasheet.ciiva.com/990/dta143z-d-990632.pdf?src-supplier=Digi-Key, ComponentLink6Description=https://datasheet.ciiva.com/990/dta143z-d-990633.pdf?src-supplier=Digi-Key, ComponentLink6URL=https://datasheet.ciiva.com/990/dta143z-d-990633.pdf?src-supplier=Digi-Key, ComponentLink7Description=https://datasheet.ciiva.com/11209/dta114e-d-11209209.pdf?src-supplier=Avnet, ComponentLink7URL=https://datasheet.ciiva.com/11209/dta114e-d-11209209.pdf?src-supplier=Avnet, ComponentLink8Description=https://datasheet.ciiva.com/16353/dta143z-d-16353804.pdf?src-supplier=Future+Electronics, ComponentLink8URL=https://datasheet.ciiva.com/16353/dta143z-d-16353804.pdf?src-supplier=Future+Electronics, ComponentLink9Description=https://datasheet.ciiva.com/22661/1708306-22661189.pdf?src-supplier=Element14, ComponentLink9URL=https://datasheet.ciiva.com/22661/1708306-22661189.pdf?src-supplier=Element14, ComponentLink10Description=https://datasheet.ciiva.com/25999/dta114e-d-25999642.pdf?src-supplier=Avnet+Europe, ComponentLink10URL=https://datasheet.ciiva.com/25999/dta114e-d-25999642.pdf?src-supplier=Avnet+Europe, Contact Plating=Tin,Matte, Element Configuration=Single, Halogen Free="Halogen Free", Height=1.01mm, hFE Min=80, Lead Free="Lead Free", Length=3.04mm, Manufacturer Part Number=MMUN2133LT1G, Max Breakdown Voltage=50V, Max Collector Current=100mA, Max Output Current=100mA, Number of Pins=3, Operating Supply Voltage=50V, Packaging="Tape and Reel", Polarity=PNP, Power Dissipation=246mW, Pricing 1="1=0.15000, 10=0.13600, 100=0.07430, 500=0.04570, 1000=0.03116 (USD)", Radiation Hardening=No, REACH SVHC="No SVHC", RoHS=Yes, RoHS Compliant=Yes, Series=-, Stock 1=8590, Supplier 1=Digi-Key, Width=1.4mm
R1: library part MCR10ERTF1874, "Res SMD 1.87M Ohm 1% 1/8W 0805", Case Code (Imperial)=0805, Case Code (Metric)=2012, Manufacturer=Rohm, Max Operating Temperature=155°C, Max Power Dissipation=125mW, Min Operating Temperature=-55°C, Package Quantity=5000, Resistance=1.87MR, Resistor Type="Thick Film", Supplier Part Number 1=RHM1.87MCHCT-ND, Temperature Coefficient=100ppm/°C, Tolerance=1%, Voltage Rating (DC)=150V, Case/Package=0805, Category="Chip SMD Resistors", ComponentLink1Description=https://datasheet.ciiva.com/18605/mcr-g-18605815.pdf?src-supplier=Digi-Key, ComponentLink1URL=https://datasheet.ciiva.com/18605/mcr-g-18605815.pdf?src-supplier=Digi-Key, ComponentLink2Description=https://datasheet.ciiva.com/18605/mcr-g-18605816.pdf?src-supplier=Digi-Key, ComponentLink2URL=https://datasheet.ciiva.com/18605/mcr-g-18605816.pdf?src-supplier=Digi-Key, ComponentLink3Description=https://datasheet.ciiva.com/18605/mcr-g-18605817.pdf?src-supplier=Digi-Key, ComponentLink3URL=https://datasheet.ciiva.com/18605/mcr-g-18605817.pdf?src-supplier=Digi-Key, Height=0.024inch, Length=0.079inch, Manufacturer Part Number=MCR10ERTF1874, Number of Terminations=2, Packaging="Tape and Reel", Pricing 1="1=0.10000, 10=0.01500, 100=0.00620, 1000=0.00278, 2500=0.00242 (USD)", RoHS=Yes, RoHS Compliant=Yes, Stock 1=2848, Supplier 1=Digi-Key, Width=0.049inch
R2: library part RMCF0805FT340K, "Res Thick Film 0805 340K Ohm 1% 1/8W ±100ppm/°C Molded SMD SMD Paper T/R", Case Code (Imperial)=0805, Case Code (Metric)=2012, Manufacturer="Stackpole Electronics", Max Operating Temperature=155°C, Max Power Dissipation=125mW, Min Operating Temperature=-55°C, Resistance=340kR, Resistor Type="Thick Film", Supplier Part Number 1=RMCF0805FT340KCT-ND, Temperature Coefficient=100ppm/°C, Tolerance=1%, Case/Package=0805, Category="Chip SMD Resistors", ComponentLink1Description=http://components.arrow.com/part/dataview/47688621S8206446N1174?src-supplier=Arrow+Electronics, ComponentLink1URL=http://components.arrow.com/part/dataview/47688621S8206446N1174?src-supplier=Arrow+Electronics, ComponentLink2Description=https://www.seielect.com/catalog/SEI-RMCF_RMCP.pdf?src-supplier=Avnet, ComponentLink2URL=https://www.seielect.com/catalog/SEI-RMCF_RMCP.pdf?src-supplier=Avnet, ComponentLink3Description=https://www.seielect.com/Catalog/SEI-RMCF_RMCP.pdf?src-supplier=Digi-Key, ComponentLink3URL=https://www.seielect.com/Catalog/SEI-RMCF_RMCP.pdf?src-supplier=Digi-Key, Contact Plating=Tin,Matte, Features="Automotive AEC-Q200", Height=0.026inch, Length=0.079inch, Manufacturer Part Number=RMCF0805FT340K, Mount="Surface Mount", Number of Terminations=2, Packaging="Tape and Reel", Pricing 1="1=0.10000, 10=0.02700, 100=0.01090, 1000=0.00488, 2500=0.00423 (USD)", Radiation Hardening=No, RoHS=Yes, RoHS Compliant=Yes, Series=RMCF, Stock 1=3256, Supplier 1=Digi-Key, Width=0.049inch
R3: library part RMCF0603FT1M07, "Res Thick Film 0603 1.07M Ohm 1% 1/10W ±200ppm/°C Molded SMD SMD Paper T/R", Case/Package=0603, Manufacturer="Stackpole Electronics", Max Operating Temperature=155°C, Min Operating Temperature=-55°C, Resistance=1.07MR, Resistor Type="Thick Film", Supplier Part Number 1=RMCF0603FT1M07CT-ND, Temperature Coefficient=200ppm/°C, Tolerance=1%, Category="Chip SMD Resistors", ComponentLink1Description=https://www.seielect.com/catalog/sei-rmcf_rmcp.pdf?src-supplier=Digi-Key, ComponentLink1URL=https://www.seielect.com/catalog/sei-rmcf_rmcp.pdf?src-supplier=Digi-Key, ComponentLink2Description=https://www.seielect.com/catalog/SEI-RMCF_RMCP.pdf?src-supplier=Avnet, ComponentLink2URL=https://www.seielect.com/catalog/SEI-RMCF_RMCP.pdf?src-supplier=Avnet, Contact Plating=Tin,Matte, Manufacturer Part Number=RMCF0603FT1M07, Mount="Surface Mount", Packaging="Tape and Reel", Pricing 1="1=0.10000, 10=0.02500, 100=0.01020, 1000=0.00457, 2500=0.00397 (USD)", Radiation Hardening=No, RoHS=Yes, RoHS Compliant=Yes, Stock 1=21406, Supplier 1=Digi-Key
R4 R13: library part ERJ-6GEYJ204V, "Res Thick Film 0805 200K Ohm 5% 1/8W ±200ppm/°C Molded SMD Punched Carrier T/R", Case Code (Imperial)=0805, Case Code (Metric)=2012, Manufacturer=Panasonic, Max Operating Temperature=155°C, Max Power Dissipation=125mW, Min Operating Temperature=-55°C, Package Quantity=1, Resistance=200kR, Resistance Tolerance=5%, Resistor Type="Thick Film", Supplier Part Number 1=P200KACT-ND, Temperature Coefficient=200ppm/°C, Voltage Rating=150V, Case/Package=0805, Category="Chip SMD Resistors", ComponentLink1Description=https://datasheet.ciiva.com/11821/0900766b80f806dd-11821568.pdf?src-supplier=RSComponents, ComponentLink1URL=https://datasheet.ciiva.com/11821/0900766b80f806dd-11821568.pdf?src-supplier=RSComponents, ComponentLink2Description=https://datasheet.ciiva.com/5868/1500035-5868198.pdf?src-supplier=Farnell, ComponentLink2URL=https://datasheet.ciiva.com/5868/1500035-5868198.pdf?src-supplier=Farnell, ComponentLink3Description=https://datasheet.ciiva.com/9184/aoa0000ce1-9184617.pdf?src-supplier=Avnet, ComponentLink3URL=https://datasheet.ciiva.com/9184/aoa0000ce1-9184617.pdf?src-supplier=Avnet, ComponentLink4Description=https://datasheet.ciiva.com/30055/4aoa0000ce1-30055656.pdf?src-supplier=Onlinecomponents.com, ComponentLink4URL=https://datasheet.ciiva.com/30055/4aoa0000ce1-30055656.pdf?src-supplier=Onlinecomponents.com, ComponentLink5Description=https://datasheet.ciiva.com/16762/70255313-16762071.pdf?src-supplier=Allied+Electronics, ComponentLink5URL=https://datasheet.ciiva.com/16762/70255313-16762071.pdf?src-supplier=Allied+Electronics, ComponentLink6Description=https://datasheet.ciiva.com/28675/1678796-28675838.pdf?src-supplier=Element14, ComponentLink6URL=https://datasheet.ciiva.com/28675/1678796-28675838.pdf?src-supplier=Element14, ComponentLink7Description=https://datasheet.ciiva.com/46374/1500035-46374298.pdf?src-supplier=Element14, ComponentLink7URL=https://datasheet.ciiva.com/46374/1500035-46374298.pdf?src-supplier=Element14, ComponentLink8Description=https://datasheet.ciiva.com/46387/1500035-46387371.pdf?src-supplier=Element14, ComponentLink8URL=https://datasheet.ciiva.com/46387/1500035-46387371.pdf?src-supplier=Element14, ComponentLink9Description=https://datasheet.ciiva.com/16513/aoa0000ce1-16513755.pdf?src-supplier=Avnet+Asia, ComponentLink9URL=https://datasheet.ciiva.com/16513/aoa0000ce1-16513755.pdf?src-supplier=Avnet+Asia, Construction=Rectangular, Contact Plating=Tin, Depth=1.25mm, Features="Automotive AEC-Q200", Height=0.6mm, Lead Free="Lead Free", Length=2mm, Manufacturer Part Number=ERJ-6GEYJ204V, Military Standard=Not, Mount="Surface Mount", Number of Terminations=2, Packaging="Tape and Reel", Power Rating=125mW, Pricing 1="1=0.10000, 10=0.06900, 100=0.02800, 1000=0.01259, 2500=0.01092 (USD)", Radiation Hardening=No, REACH SVHC="No SVHC", RoHS=Yes, RoHS Compliant=Yes, Series=ERJ, Stock 1=61840, Supplier 1=Digi-Key, Technology="THICK FILM", Termination=SMD/SMT, Tolerance=5%, Voltage Rating (DC)=150V, Width=1.25mm
R5 R8 R14 R16 R20: library part CRGCQ0805F1K0, "Res Thick Film 0805 1K Ohm 1% 0.125W(1/8W) ±100ppm/C Pad SMD Automotive T/R", Case Code (Imperial)=0805, Case Code (Metric)=2012, Manufacturer="TE Connectivity", Max Operating Temperature=155°C, Max Power Dissipation=125mW, Min Operating Temperature=-55°C, Resistance=1kR, Resistor Type="Thick Film", Supplier Part Number 1=A129749CT-ND, Temperature Coefficient=100ppm/°C, Tolerance=1%, Case/Package=0805, Category="Chip SMD Resistors", ComponentLink1Description=https://4donline.ihs.com/images/VipMasterIC/IC/TYEL/TYEL-S-A0004929575/TYEL-S-A0004929575-1.pdf?hkey=52A5661711E402568146F3353EA87419&src-supplier=Farnell, ComponentLink1URL=https://4donline.ihs.com/images/VipMasterIC/IC/TYEL/TYEL-S-A0004929575/TYEL-S-A0004929575-1.pdf?hkey=52A5661711E402568146F3353EA87419&src-supplier=Farnell, ComponentLink2Description=https://www.te.com/commerce/DocumentDelivery/DDEController?Action=srchrtrv&DocNm=1773204-3&DocType=DS&DocLang=English&src-supplier=Digi-Key, ComponentLink2URL=https://www.te.com/commerce/DocumentDelivery/DDEController?Action=srchrtrv&DocNm=1773204-3&DocType=DS&DocLang=English&src-supplier=Digi-Key, ComponentLink3Description=https://www.te.com/commerce/DocumentDelivery/DDEController?Action=srchrtrv&amp;DocNm=1773204-3&amp;DocType=DS&amp;DocLang=English&src-supplier=Digi-Key, ComponentLink3URL=https://www.te.com/commerce/DocumentDelivery/DDEController?Action=srchrtrv&amp;DocNm=1773204-3&amp;DocType=DS&amp;DocLang=English&src-supplier=Digi-Key, Features="Moisture Resistant,Automotive AEC-Q200", Manufacturer Part Number=CRGCQ0805F1K0, Number of Terminations=2, Packaging="Cut Tape", Pricing 1="1=0.10000, 10=0.05800, 100=0.02350, 1000=0.01057, 2500=0.00918 (USD)", RoHS=Yes, RoHS Compliant=Yes, Stock 1=111660, Supplier 1=Digi-Key
R6: library part RMCF0805FT270K, "Res Thick Film 0805 270K Ohm 1% 1/8W ±100ppm/°C Molded SMD SMD Paper T/R", Case/Package=0805, Manufacturer="Stackpole Electronics", Max Operating Temperature=155°C, Max Power Dissipation=125mW, Min Operating Temperature=-55°C, Resistance=270kR, Resistor Type="Thick Film", Supplier Part Number 1=RMCF0805FT270KCT-ND, Temperature Coefficient=100ppm/°C, Tolerance=1%, Category="Chip SMD Resistors", ComponentLink1Description=https://www.seielect.com/Catalog/SEI-RMCF_RMCP.pdf?src-supplier=Digi-Key, ComponentLink1URL=https://www.seielect.com/Catalog/SEI-RMCF_RMCP.pdf?src-supplier=Digi-Key, ComponentLink2Description=https://www.seielect.com/catalog/SEI-RMCF_RMCP.pdf?src-supplier=Avnet, ComponentLink2URL=https://www.seielect.com/catalog/SEI-RMCF_RMCP.pdf?src-supplier=Avnet, Contact Plating=Tin,Matte, Features="Automotive AEC-Q200", Height=0.026inch, Lead Free="Lead Free", Length=0.079inch, Manufacturer Part Number=RMCF0805FT270K, Mount="Surface Mount", Number of Terminations=2, Packaging="Tape and Reel", Pricing 1="1=0.10000, 10=0.02700, 100=0.01090, 1000=0.00488, 2500=0.00423 (USD)", Radiation Hardening=No, RoHS=Yes, RoHS Compliant=Yes, Series=RMCF, Stock 1=32162, Supplier 1=Digi-Key, Width=0.049inch